# Altium PCB PCB1.1.PcbDoc (part 1 of 2)
Units mm, origin at the board's own origin, x right, y up, seen from the top; angles counter-clockwise.
Board outline 50 x 50 mm, 4 copper layers (Top Layer, Mid-Layer 1, Mid-Layer 2, Bottom Layer); 153 components, 106 nets, 555 pads, 173 vias.
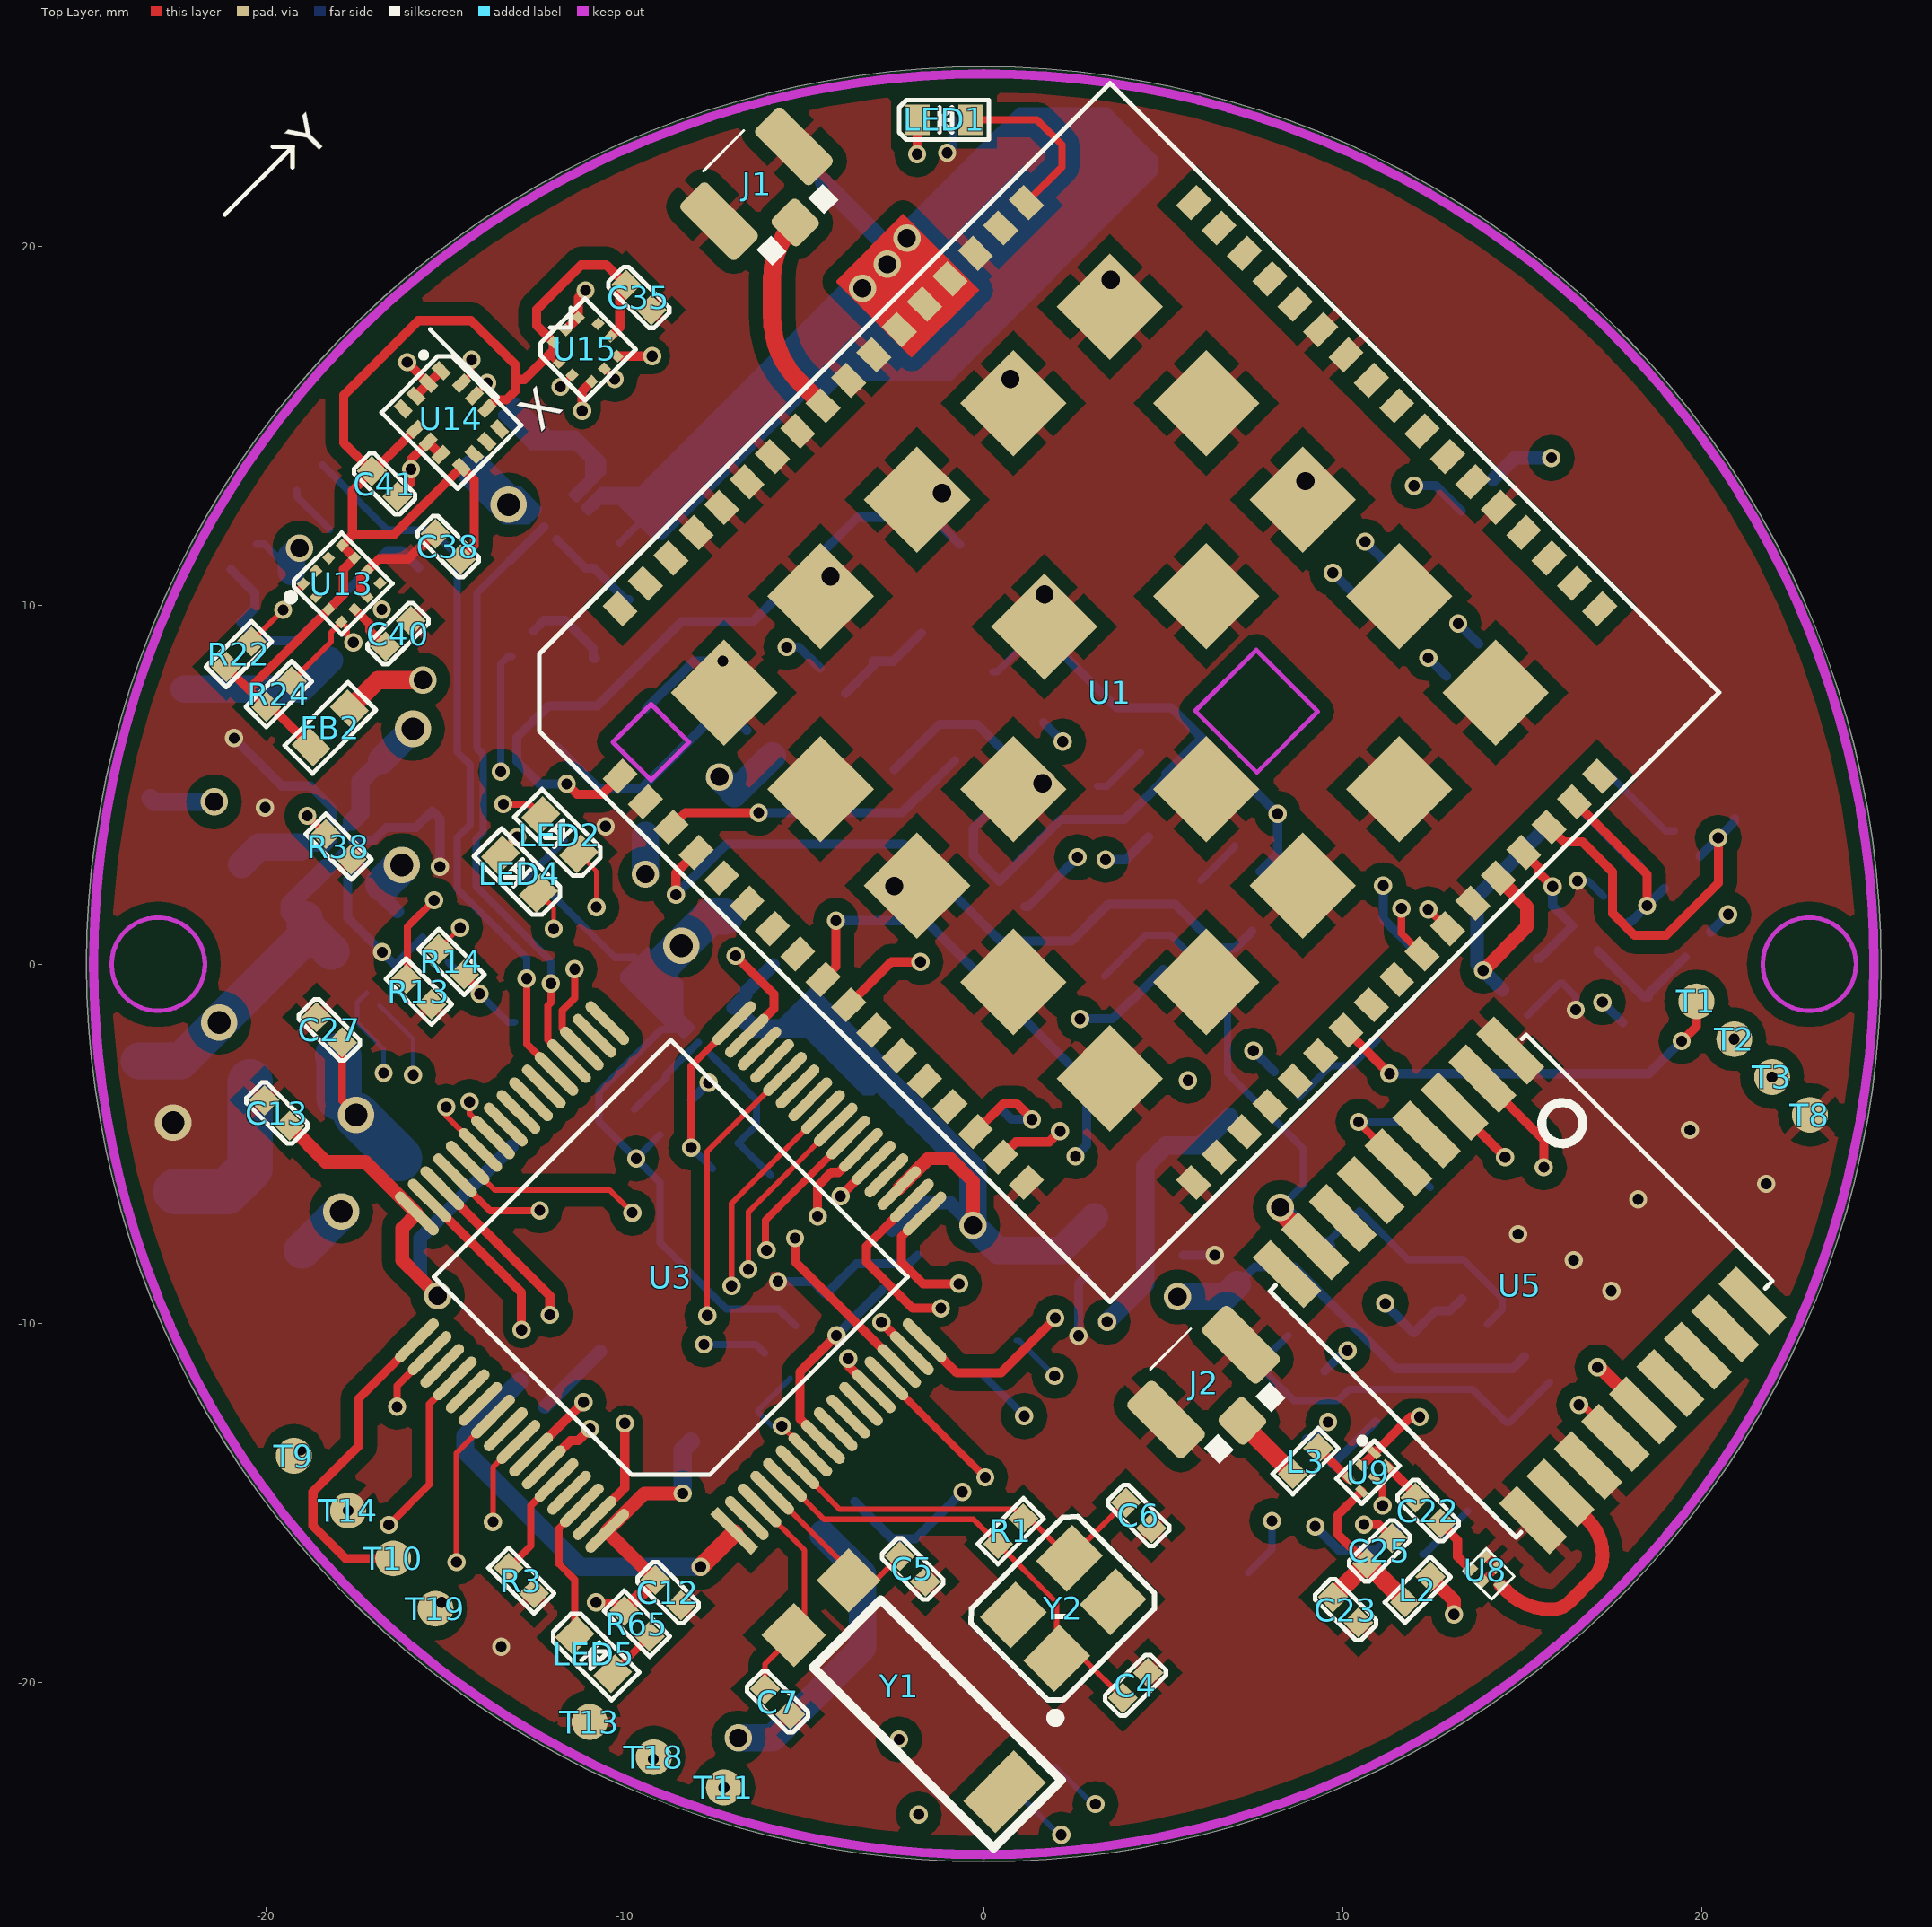
[diagram p0: Top Layer view]
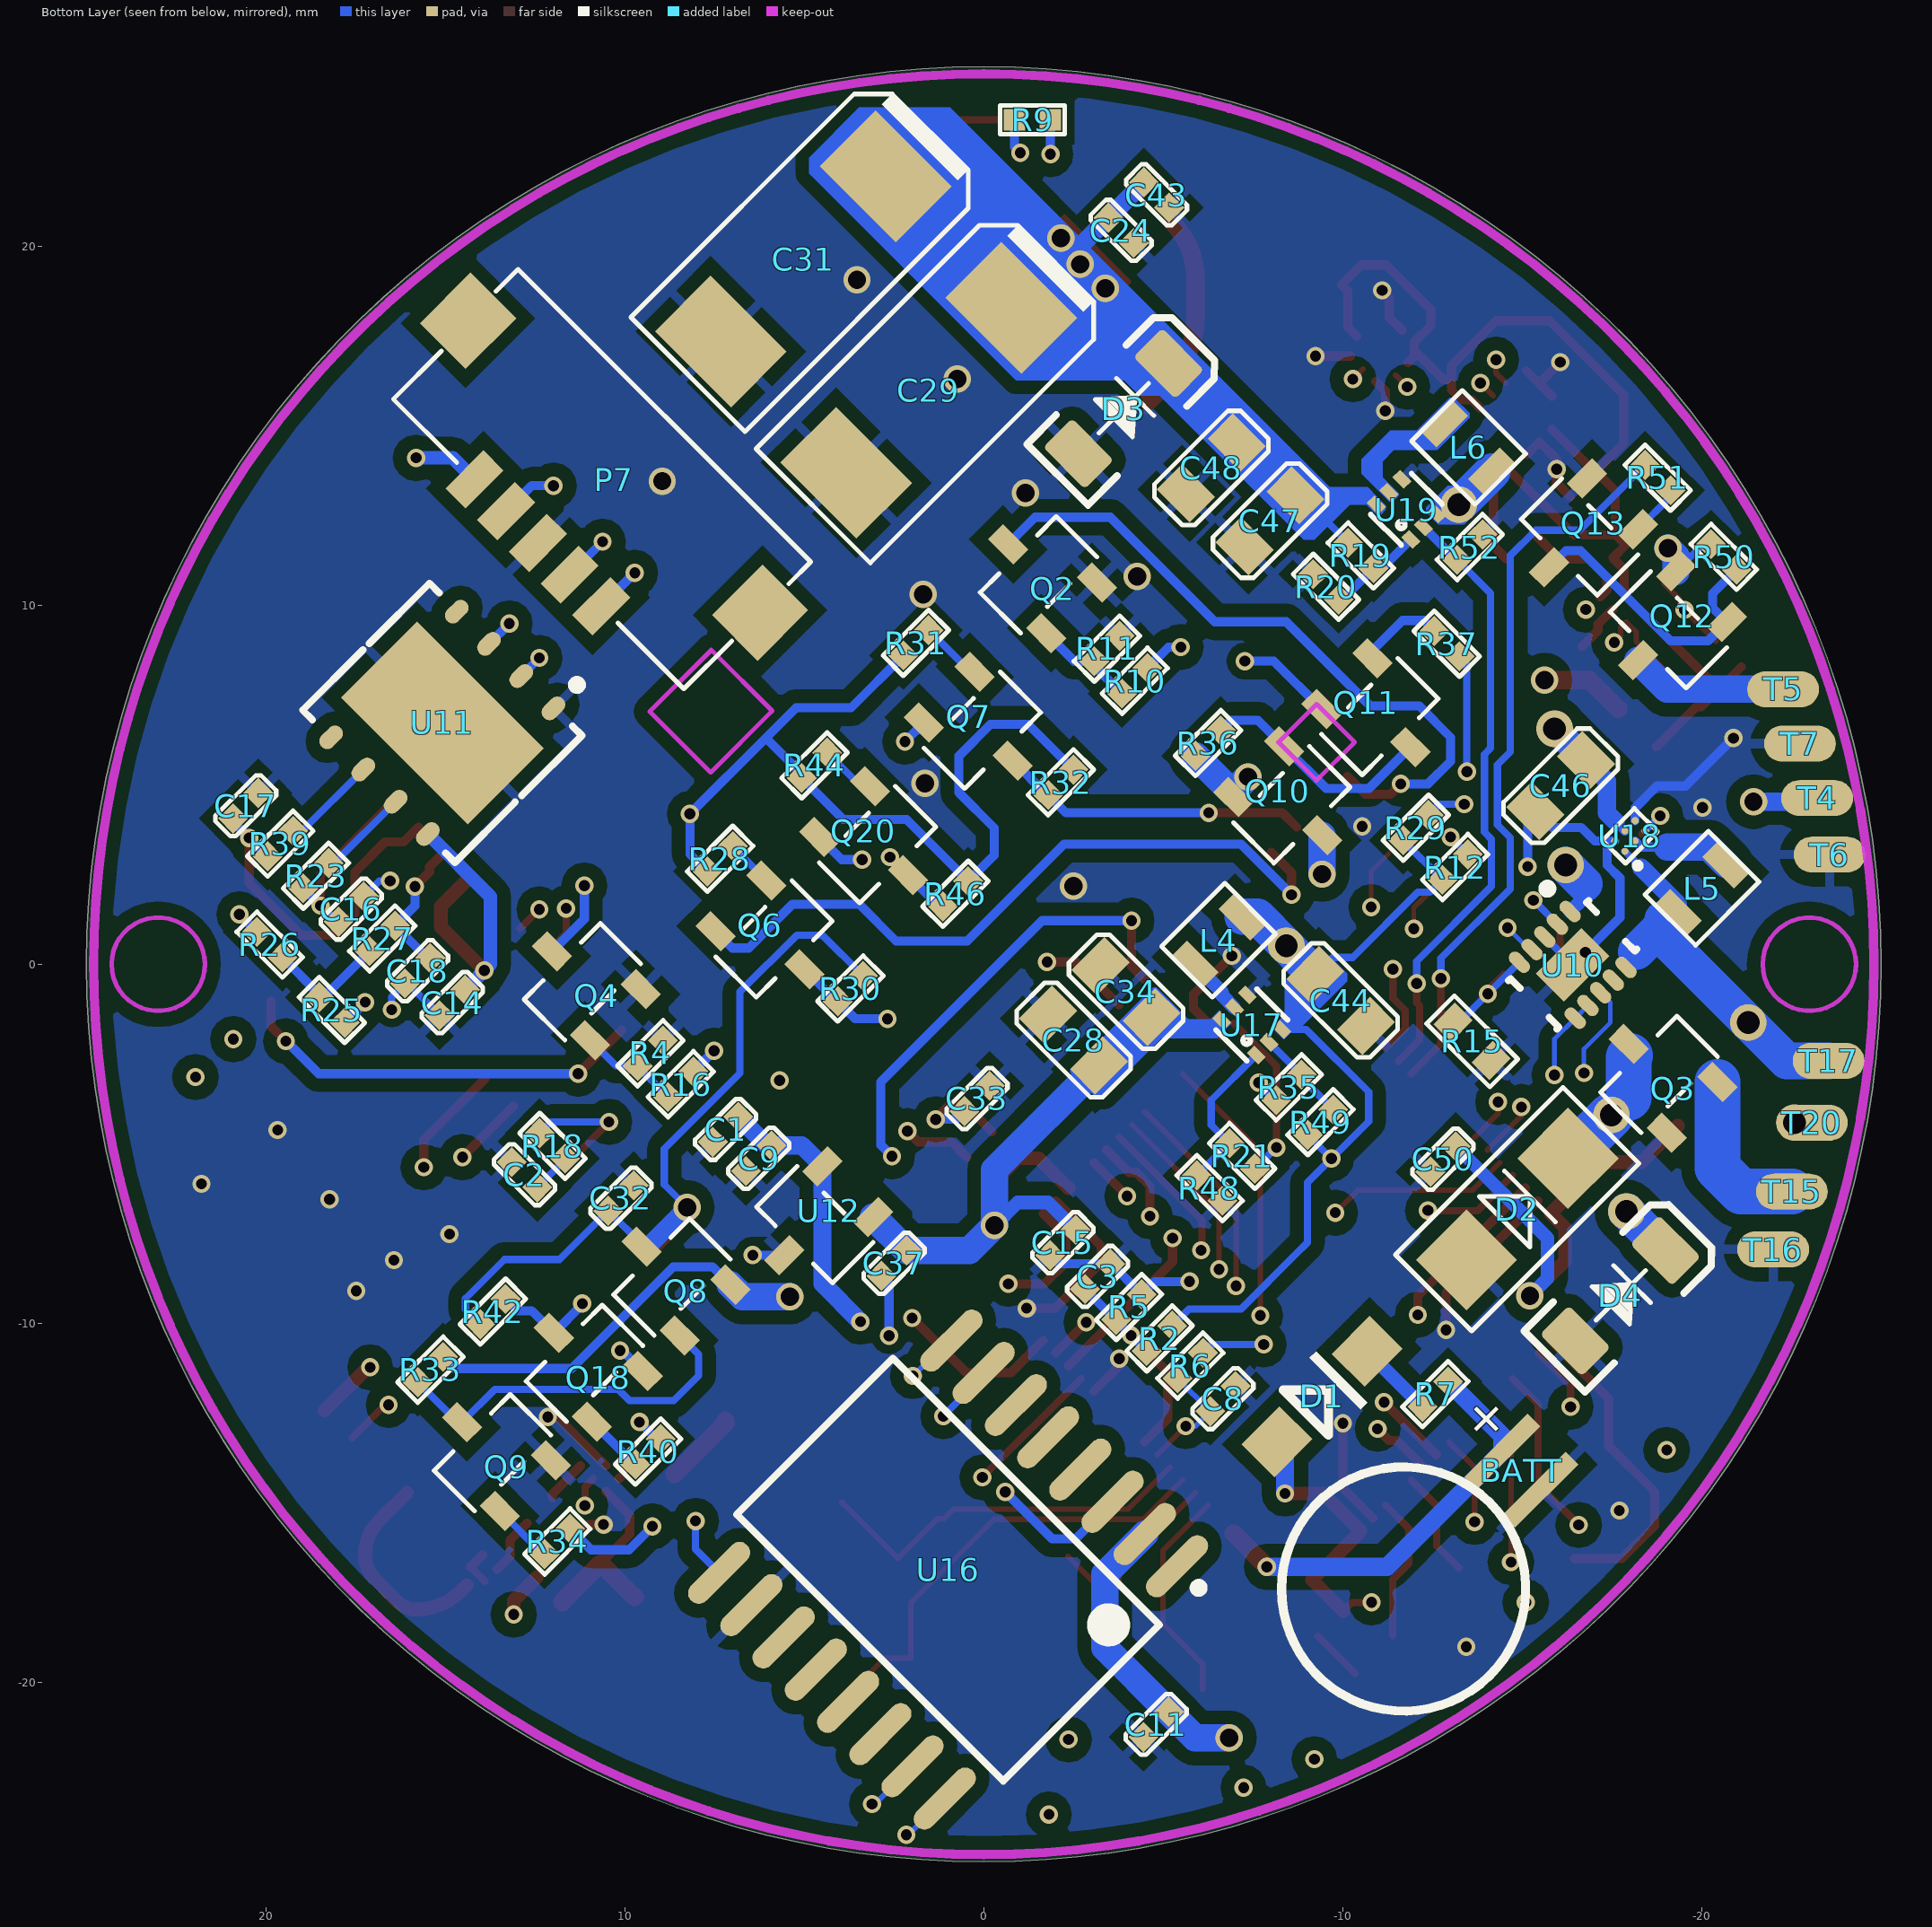
[diagram p1: Bottom Layer view, seen from below]
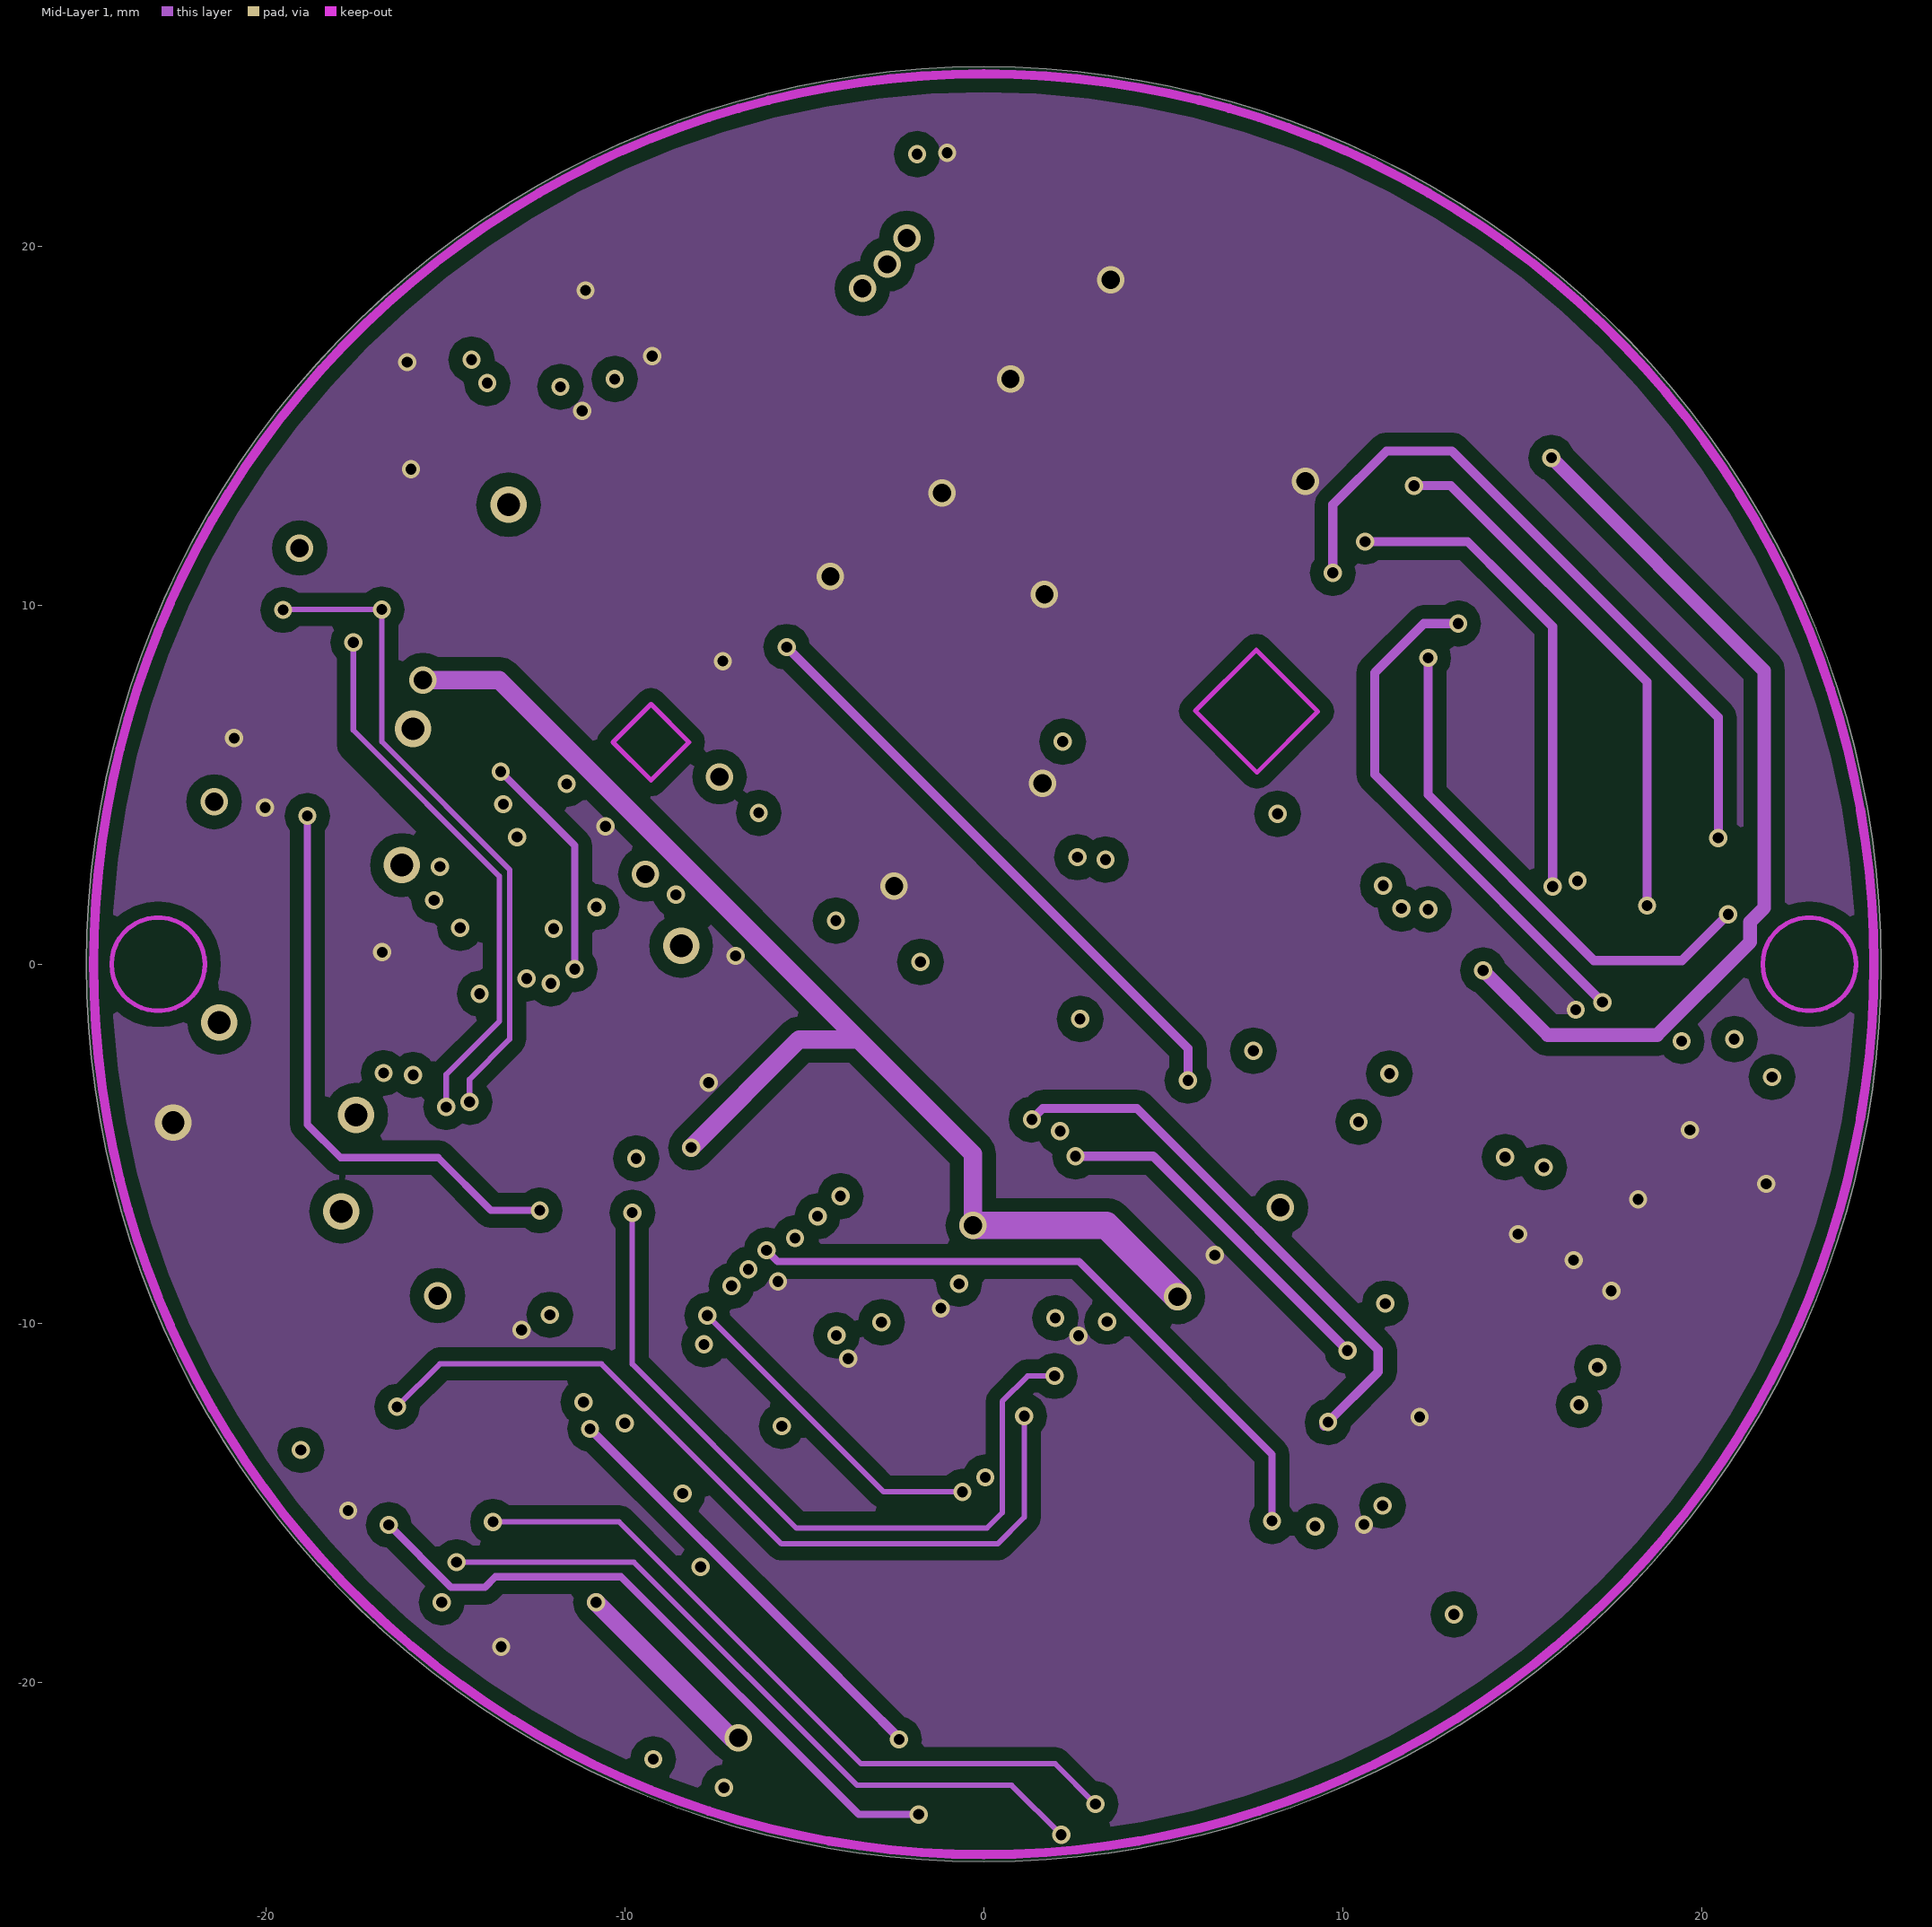
[diagram p2: Mid-Layer 1]
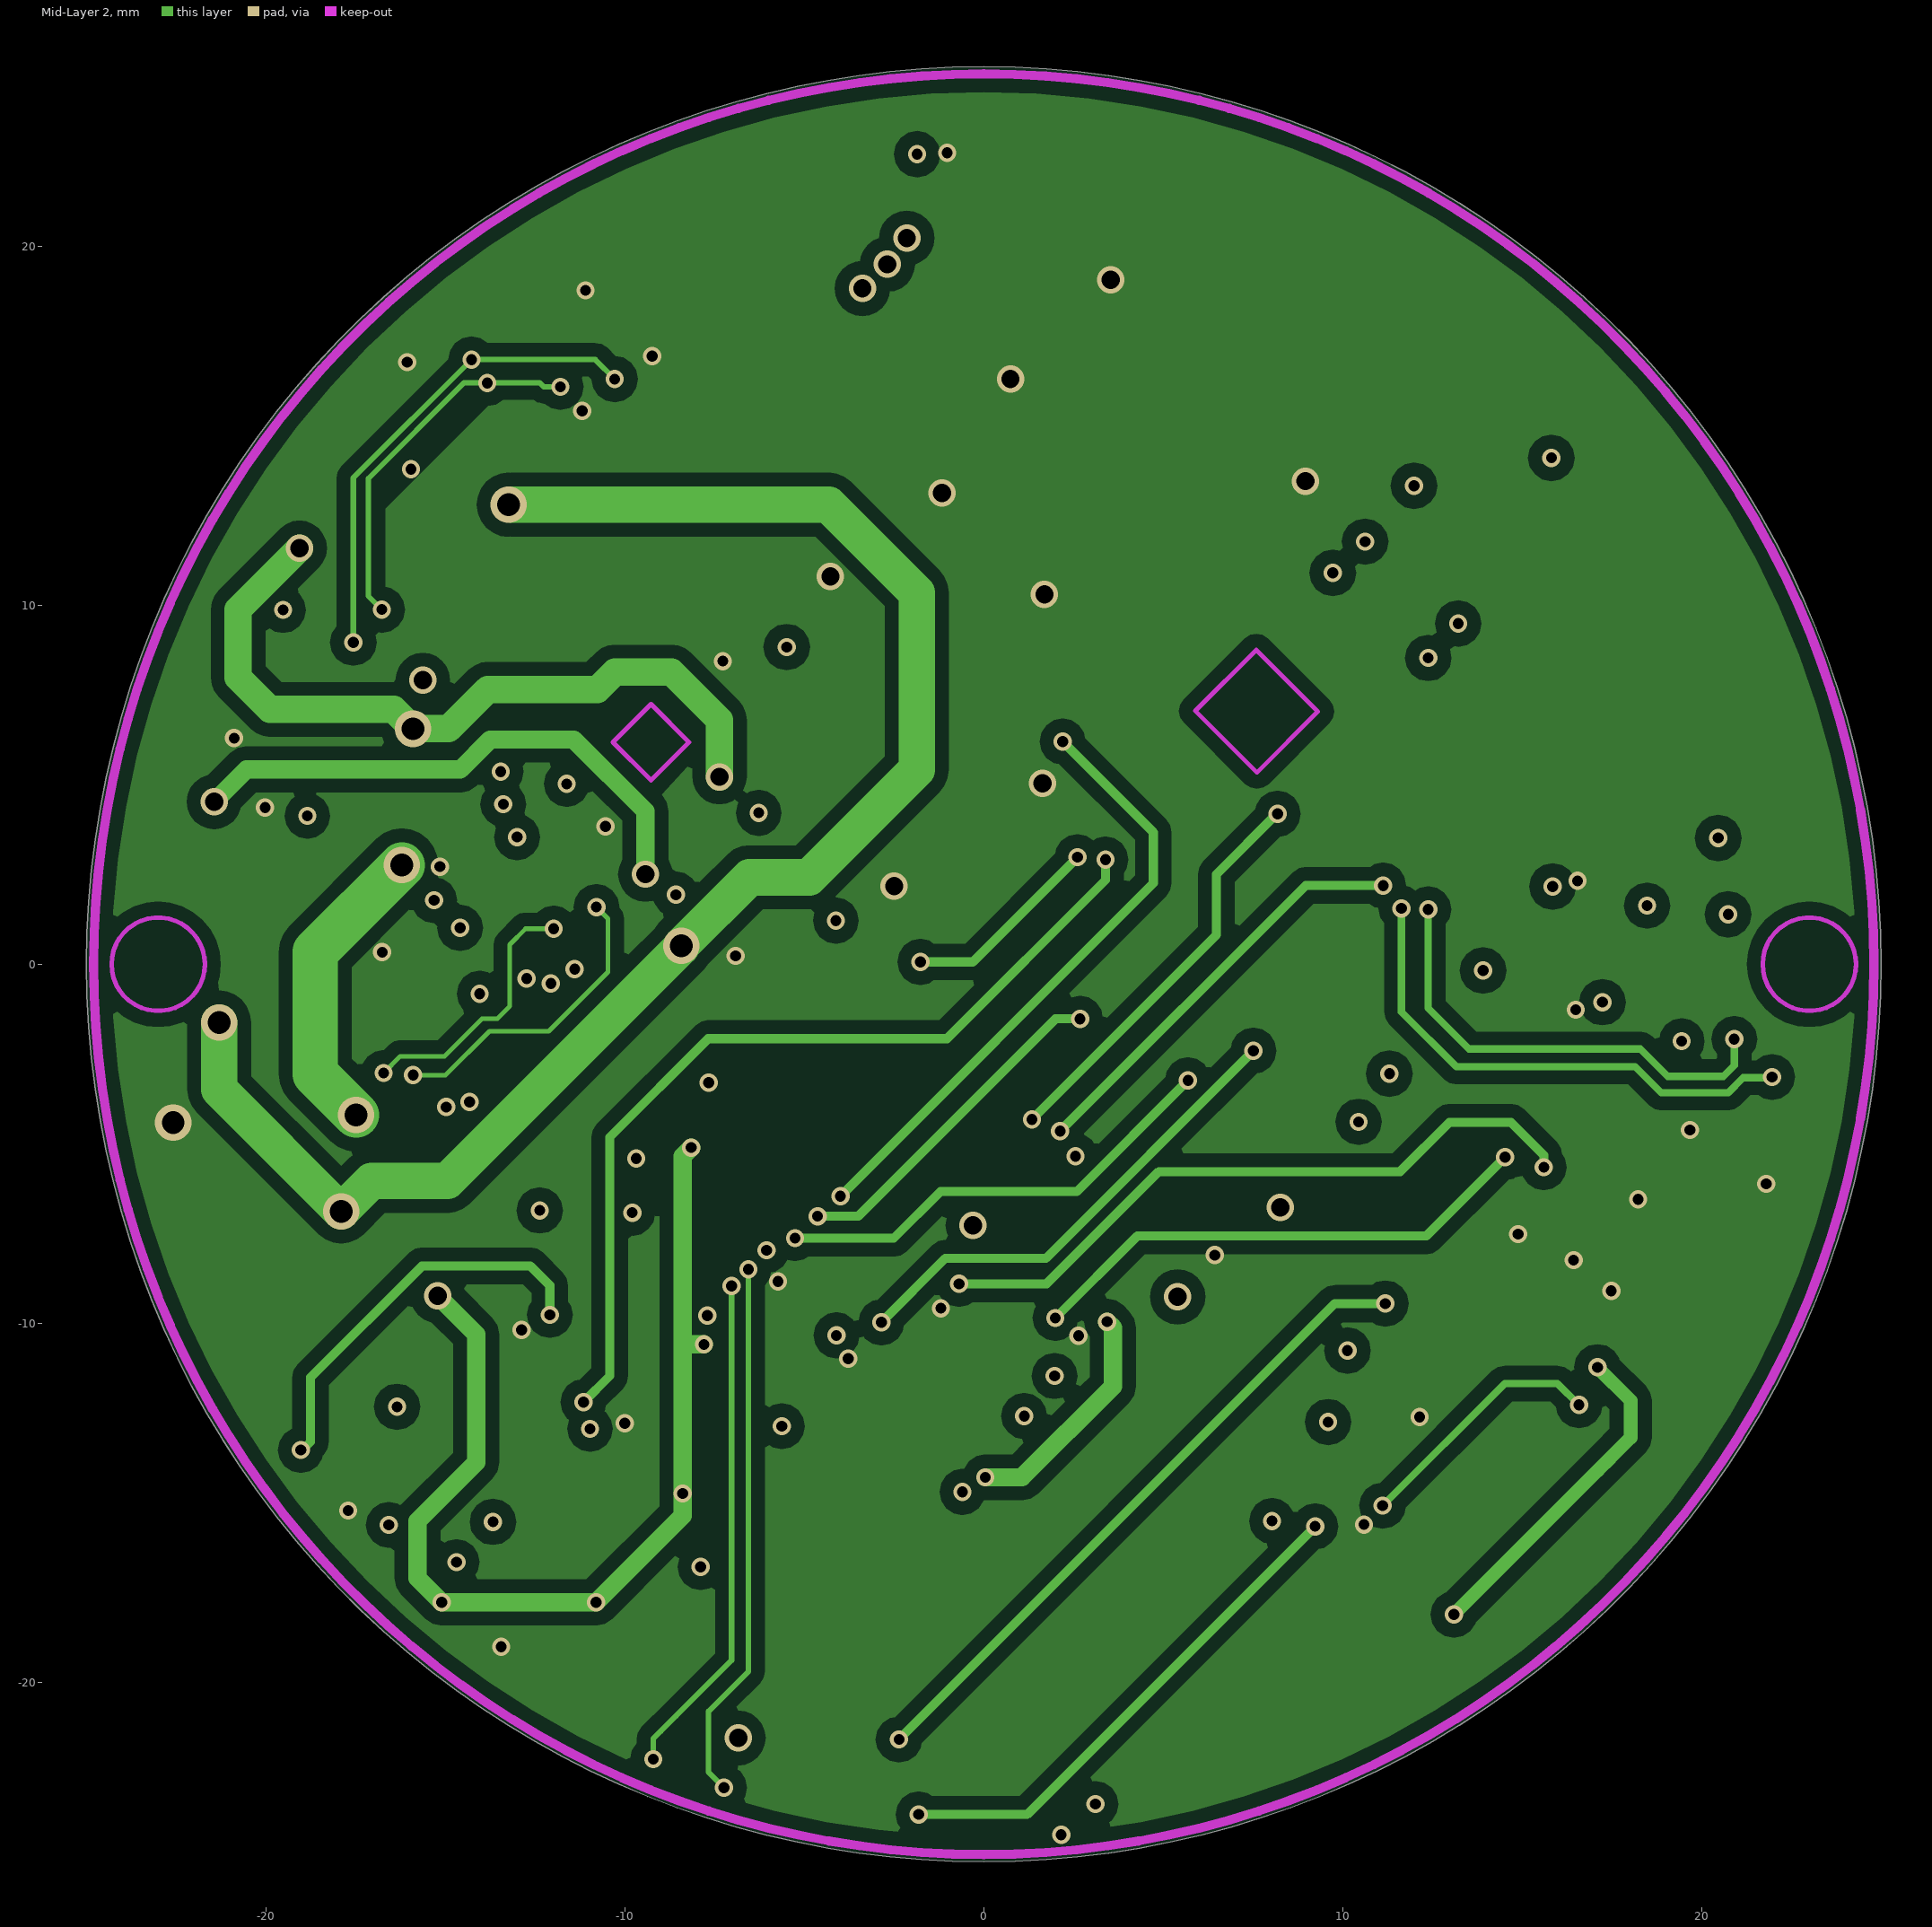
[diagram p3: Mid-Layer 2]

## Layer stack, top to bottom
Top Layer: signal copper 0.0356
Dielectric: core 0.32, FR-4, Dk 4.8
Mid-Layer 1: signal copper 0.0356
Dielectric: prepreg 0.32, FR-4, Dk 4.8
Mid-Layer 2: signal copper 0.0356
Dielectric: core 0.32, FR-4, Dk 4.8
Bottom Layer: signal copper 0.0356

## Board outline
-25,0 ccw(c0,0) 0,-25 ccw(c0,0) 25,0 ccw(c0,0) 0,25 ccw(c0,0)

## Design rules (kind name [scope] priority, off if disabled: settings)
Clearance [InPolygon  And InNet(AGND)] p1: gap=0.381
Clearance Clearance_1 [All] p2: gap=0.127
HoleToHoleClearance [All] p1: gap=0.127 allowstackedmicrovias=TRUE
MinimumSolderMaskSliver [All] p1: minsoldermaskwidth=0.025
PolygonConnect PolygonConnect_1 [InNet('AGND') And IsVia] p1: connectstyle=Direct reliefconductorwidth=0.254 reliefentries=4 polygonreliefangle="90 Angle"
PolygonConnect [All] p2: connectstyle=Relief reliefconductorwidth=0.254 reliefentries=4 polygonreliefangle="90 Angle"
RoutingVias [All] p1: holewidth=0.711 width=1.27 viastyle="Through Hole" minholewidth=0.711 minwidth=1.27 maxholewidth=0.711 maxwidth=1.27
SilkToSilkClearance [All] p1: silktosilkclearance=0.127
SilkscreenOverComponentPads [All] p1: minsilkscreentomaskgap=0.025
SolderMaskExpansion [All] p1: expansion=0.102
Width [All] p1: maxlimit=5.08 minlimit=0.127 preferedwidth=0.254
24 further rules are at their usual default settings.

## Classes and differential pairs
component class 4G: C2 C23 C32 L2 Q4 R4 R16 R18 U1 U5 U?
component class CPU: BATT C3 C4 C5 C6 C7 C8 C9 C11 C12 C13 C15 C50 D1 LED5 R1 R2 R3 R5 R6 R7 R65 T9 T10 T11 T13 T14 T18 T19 U3 U16 U? Y1 Y2
component class GPS&&lte: C14 C16 C17 C18 C22 C24 C25 C26 C29 C30 C31 C33 C43 D3 J1 J2 L3 LED1 P7 Q2 Q6 Q7 Q18 Q19 Q20 Q21 R8 R9 R10 R11 R23 R25 R26 R27 R28 R30 R31 R32 R39 R40 R41 R42 R43 R44 R45 R46 R47 T1 T2 T3 T8 U8 U9 U11
component class power: C1 C27 C28 C34 C37 C44 C46 C47 C48 D2 D4 L4 L5 L6 LED2 LED4 Q3 Q8 Q9 Q10 Q11 Q12 Q13 R12 R13 R14 R15 R19 R20 R21 R29 R33 R34 R35 R36 R37 R38 R48 R49 R50 R51 R52 T4 T5 T6 T7 T15 T16 T17 T20 U10 U12 U17 U18 U19
component class sensors: C35 C38 C40 C41 FB2 R22 R24 U13 U14 U15

## Components (designator, comment, footprint, x,y, rotation, side; value= is the part's Value field where it differs from the comment)
BATT "MS621FE" MS621FE -14.974,-14.107 r135 bottom
C1 "0.1uF/25V" 0402c 6.84,-4.247 r315 bottom
C2 "4.7uF/10V" 0402c 13.149,-5.509 r225 bottom
C3 "0.1uF/25v" 0402c -2.818,-9.051 r135 bottom
C4 "22pF" 0402c 4.578,-19.732 r225 top
C5 "6pF" 0402c -2.339,-16.488 r315 top
C6 "22pF" 0402c 4.667,-15.706 r135 top
C7 "6pF" 0402c -6.098,-20.19 r315 top
C8 "0.1uF/25V" 0402C -7.016,-11.746 r315 bottom
C9 "0.1uF/25V" 0402C 6.624,-5.759 r135 bottom
C11 "0.1uF/25V" 0402C -4.446,-21.527 r135 bottom
C12 "0.1uF/25V" 0402C -8.442,-17.855 r135 top
C13 "0.1uF/25V" 0402C -20.045,-3.791 r315 top
C14 "0.1uF" 0402C 15.158,-1.421 r135 bottom
C15 "0.1uF/25V" 0402C -1.849,-8.105 r135 bottom
C16 "10pF/NC" 0402C 17.271,1.891 r315 bottom
C17 "10pF/NC" 0402C 20.209,4.768 r315 bottom
C18 "10pF/NC" 0402C 16.128,-0.536 r135 bottom
C22 "36pF" 0402c 12.728,-15.571 r135 top
C23 "4.7uF" 0402c 10.435,-18.334 r135 top
C24 "10pF" 0402C -4.178,20.088 r45 bottom
C25 "0.1uF" 0402C 11.379,-15.983 r225 top
C27 "1uF/25V" 0402C -17.876,-2.181 r135 top
C28 "22uF/10V" 0805C -3.21,-2.817 r45 bottom
C29 "1000uF" 7343 -0.763,18.284 r315 bottom
C31 "1000uF" 7343 2.729,21.942 r315 bottom
C32 "10uF/10V" 0402C 9.757,-6.162 r315 bottom
C33 "0.1uF" 0402C -0.165,-3.386 r315 bottom
C34 "22uF/10V" 0805C -4.672,-1.473 r45 bottom
C35 "0.1uF/25V" 0402C -9.259,18.221 r135 top
C37 "0.1uF/25V" 0402c 2.147,-7.975 r315 bottom
C38 "0.1uF/25V" 0402C -15.279,11.987 r315 top
C40 "22pF" 0402c -16.669,8.852 r45 top
C41 "0.1uF/25V" 0402C -16.339,13.027 r135 top
C43 "33pF" 0402C -5.166,21.076 r45 bottom
C44 "22uF/10V" 0805C -9.235,-0.299 r225 bottom
C46 "22uF/10V" 0805C -16.781,5.681 r315 bottom
C47 "22uF/10V" 0805C -8.684,13.063 r315 bottom
C48 "22uF/10V" 0805C -7.048,14.531 r315 bottom
C50 "0.1uF/25V" 0402C -12.442,-5.781 r135 bottom
D1 "1N4148" DIODE_SOP -8.167,-13.299 r135 bottom
D2 "SMAJ12CA" SMA -13.448,-8.235 r135 bottom
D3 "DIODE_SCHOTTKY_0" LL-34(D1206) -3.893,15.477 r135 bottom
D4 "DIODE_SCHOTTKY_0" LL-34(D1206) -17.737,-9.232 r135 bottom
FB2 "10R/1A" 0603R -17.676,7.116 r225 top
J1 "IPEX" RF-UFL -6.331,21.739 r45 top
J2 "IPEX" RF-UFL 6.123,-11.64 r45 top
L2 "27nH" 0402R 12.443,-17.067 r225 top
L3 "LQW15A" 0402R 9.318,-13.489 r225 top
L4 "SRP4020TA-1R0M" L2520 -5.869,-0.015 r135 bottom
L5 "SRP4020TA-2R2M" L2520 -19.338,1.432 r135 bottom
L6 "SRP4020TA-1R0M" L2520 -12.822,15.068 r225 bottom
LED1 "LED" 0603LED -0.357,23.523 r180 top
LED2 "LED" 0603LED -12.342,4.137 r315 top
LED4 "LED" 0603LED -13.468,3.043 r315 top
LED5 "LED" 0603LED -10.335,-19.758 r135 top
P7 "Header 5" 5×1.25mmSMT 10.655,9.969 r45 bottom
Q2 "MMBT3904" SOT23-3 -1.737,9.223 r225 bottom
Q3 "Si2369DS" sot23-3 -19.025,-4.696 r225 bottom
Q4 "MMBT3904" SOT23-3 10.968,-2.112 r225 bottom
Q6 "MMBT3904" SOT23-3 6.057,2.331 r45 bottom
Q7 "MMBT3904" SOT23-3 0.253,8.144 r45 bottom
Q8 "Si2369DS" sot23-3 8.476,-10.338 r225 bottom
Q9 "S8050" SOT23-3 13.478,-15.233 r225 bottom
Q10 "Si2369DS" sot23-3 -8.367,6.067 r45 bottom
Q11 "S8050" SOT23-3 -10.825,8.525 r45 bottom
Q12 "Si2369DS" sot23-3 -20.701,9.53 r135 bottom
Q13 "S8050" SOT23-3 -18.223,12.114 r135 bottom
Q18 "MMBT3904" SOT23-3 10.916,-12.744 r225 bottom
Q20 "MMBT3904" SOT23-3 3.173,4.956 r45 bottom
R1 "1MR" 0402R 0.395,-16.145 r45 top
R2 "10K/1%" 0402R -5.249,-10.068 r315 bottom
R3 "100K" 0402R -13.239,-16.816 r315 top
R4 "47K" 0402R 9.645,-2.832 r135 bottom
R5 "10K/1%" 0402R -3.691,-9.902 r135 bottom
R6 "10K" 0402R -6.107,-10.826 r315 bottom
R7 "470" 0402R -12.226,-12.329 r135 bottom
R9 "1K" 0402R -1.857,23.523 r0 bottom
R10 "4.7K" 0402R -3.853,7.542 r135 bottom
R11 "47K" 0402R -3.077,8.438 r135 bottom
R12 "1K/1%" 0402R -12.778,2.353 r135 bottom
R13 "3.95K/1%" 0402R -16.095,-0.41 r315 top
R14 "21.5k/1%" 0402R -14.476,-0.286 r135 top
R15 "RTH103AT" 0603R -14.136,-2.678 r45 bottom
R16 "4.7K" 0402R 8.797,-3.697 r135 bottom
R18 "10K" 0402R 12.371,-4.705 r225 bottom
R19 "534K/1%" 0402R -10.15,11.739 r225 bottom
R20 "100K/1%" 0402R -9.179,10.867 r225 bottom
R21 "400K/1%" 0402R -7.554,-5.694 r45 bottom
R22 "4.7K" 0402R -21.106,8.284 r45 top
R23 "10R" 0402R 18.96,2.112 r135 bottom
R24 "4.7K" 0402R -19.285,7.877 r225 top
R25 "0R" 0402R 17.806,-1.627 r45 bottom
R26 "0R" 0402R 20.249,0.901 r225 bottom
R27 "10R" 0402R 16.403,1.072 r315 bottom
R28 "4.7K" 0402R 6.993,3.291 r315 bottom
R29 "1K/1%" 0402R -11.683,3.449 r135 bottom
R30 "10K" 0402R 4.07,-1.031 r135 bottom
R31 "4.7K" 0402R 1.536,9.307 r315 bottom
R32 "4.7K" 0402R -1.792,4.715 r135 bottom
R33 "4K7" 0402R 15.061,-10.937 r315 bottom
R34 "4K7" 0402R 12.234,-16.432 r135 bottom
R35 "10K/1%" 0402R -8.146,-3.783 r135 bottom
R36 "4K7" 0402R -5.895,5.807 r135 bottom
R37 "4K7" 0402R -12.547,9.281 r225 bottom
R38 "10K/1%" 0402R -17.621,2.921 r135 top
R39 "10R" 0402R 19.952,3.006 r135 bottom
R40 "4.7K" 0402R 9.707,-13.93 r135 bottom
R42 "10K" 0402R 13.322,-9.322 r315 bottom
R44 "4.7K" 0402R 4.364,5.894 r315 bottom
R46 "4.7K" 0402R 1.141,1.609 r135 bottom
R48 "100K/1%" 0402R -6.645,-6.588 r45 bottom
R49 "13K/1%" 0402R -9.027,-4.753 r135 bottom
R50 "4K7" 0402R -20.264,11.701 r225 bottom
R51 "4K7" 0402R -19.131,13.2 r45 bottom
R52 "10K/1%" 0402R -13.894,11.973 r315 bottom
R65 "1K" 0402R -9.31,-18.721 r135 top
T1 "TPD" TPD 19.854,-1.034 r45 top
T2 "TPD" TPD 20.908,-2.088 r45 top
T3 "TPD" TPD 21.962,-3.142 r45 top
T4 "TPD" TP#1 -23.217,4.629 r0 top
T5 "TPD" TP#1 -22.272,7.659 r0 top
T6 "TPD" TP#1 -23.562,3.054 r0 top
T7 "TPD" TP#1 -22.737,6.144 r0 top
T8 "TPD" TPD 23.015,-4.195 r45 top
T9 "TPD" TPd -19.221,-13.693 r45 top
T10 "TPD" TPd -16.453,-16.552 r225 top
T11 "TPD" TPd -7.242,-22.93 r90 top
T13 "TPD" TPd -10.981,-21.106 r90 top
T14 "TPD" TPd -17.707,-15.219 r225 top
T15 "TPD" TP#1 -22.511,-6.332 r180 top
T16 "TPD" TP#1 -21.991,-7.942 r180 top
T17 "TPD" TP#2 -23.538,-2.693 r180 bottom
T18 "TPD" TPd -9.195,-22.089 r90 top
T19 "TPD" TPd -15.275,-17.949 r90 top
T20 "TPD" TP#1 -23.072,-4.415 r180 top
U1 "A7670" A7670 3.515,7.568 r45 top
U3 "stm32l412r8t6" LQFP-64 -6.955,-15.781 r135 top
U5 "SIM868E/SIM68" SIM68MB 14.67,-2.406 r315 top
U8 "SAFFB1G56KB0F0A" SAFFB1G56KB0F0A 14.397,-17.291 r135 top
U9 "AW5005DNR" AW5005 10.705,-14.148 r315 top
U10 "bq24210" QFN50P200X300X80-10N -16.407,-0.017 r225 bottom
U11 "SLI76CF3600P" QFN127P500X600X80-8N 15.086,6.725 r315 bottom
U12 "REF3025AIDBZR" SOT23-3 3.081,-7.041 r135 bottom
U13 "LIS2MDL" LIS2MDL -17.889,10.601 r45 top
U14 "LSM6DS3TR" LSM6DS3TR-C -14.834,15.19 r315 top
U15 "BMP388" BMP388 -11.109,17.125 r135 top
U16 "MX25L51245GMI-10G" SOP127P1030X239-16N 0.994,-16.862 r315 bottom
U17 "TPS61023" SOT563-6 -7.467,-1.699 r135 bottom
U18 "TPS610997YFFR" TPS610997YFFR -18.003,3.573 r45 bottom
U19 "TPS61023" SOT563-6 -11.773,12.662 r135 bottom
Y1 "MC-146 32.768K/6pF" 32.768K -5.294,-18.689 r45 top
Y2 "8MHz" OSCILLATOR-3.2X2.5 2.207,-17.951 r45 top

## Footprints (in the part's own frame and the unit in brackets; to place one, negate y for a bottom-side part, rotate by r counter-clockwise, add the part's x,y. Pads: shape width x height; smd on the part's side, far side on the other; paste and mask are expansions set on the pad)
5×1.25mmSMT [mm]
  rect 1.8x2 smd: 0(-3.25,-3) 0(8.25,-3)
  rect 0.8x1.5 smd: 1(0,0) 2(1.25,0) 3(2.5,0) 4(3.75,0) 5(5,0)
  round 0.5 on Bottom Overlay: ""(-0.875,0.432)
  silkscreen extent -3.25,-5 8.28,0.02
32.768K [mm]
  rect 1.27x1.27 smd: 1(0,0) 2(2.159,0)
  rect 2x1.27 smd: 3(1.07,-7.239)
  silkscreen extent -0.25,-8.13 2.41,-1.02
0402c [mm]
  rect 0.6x0.6 smd: 1(0,0) 2(1,0)
  silkscreen extent -0.4,-0.4 1.4,0.4
0402C [mm]
  rect 0.6x0.6 smd: 1(0,0) 2(1,0)
  silkscreen extent -0.4,-0.4 1.4,0.4
0402R [mm]
  rect 0.6x0.6 smd: 1(0,0) 2(1,0)
  silkscreen extent -0.4,-0.4 1.4,0.4
0603LED [mm]
  rect 0.7x0.85 smd: 1(0,0) 2(1.5,0)
  silkscreen extent -0.5,-0.55 2,0.55
0603R [mm]
  rect 0.7x0.85 smd: 1(0,0) 2(1.5,0)
  silkscreen extent -0.5,-0.55 2,0.55
0805C [mm]
  rect 1x1.3 smd: 1(0,0) 2(2,0)
  silkscreen extent -0.7,-0.8 2.7,0.8
7343 [mm]
  rect 2.2x3 smd: 1(0,0) 2(6.5,0)
  silkscreen extent -1.75,-2.25 7.8,2.25
A7670 [mm]
  rect 0.8x0.6 smd: 1(-11.3,8) 2(-11.3,7) 3(-11.3,6) 4(-11.3,5) 5(-11.3,4) 6(-11.3,3) 7(-11.3,2) 8(-11.3,1) 9(-11.3,0) 10(-11.3,-1) 11(-11.3,-2) 12(-11.3,-3) 13(-11.3,-4) 14(-11.3,-5) 15(-11.3,-6) 16(-11.3,-7) 17(-11.3,-8) 35(11.3,-8) 36(11.3,-7) 37(11.3,-6) 38(11.3,-5) 39(11.3,-4) 40(11.3,-3) 41(11.3,-2) 42(11.3,-1) 43(11.3,0) 44(11.3,1) 45(11.3,2) 46(11.3,3) 47(11.3,4) 48(11.3,5) 49(11.303,6) 50(11.3,7) 51(11.3,8)
  rect 0.6x0.8 smd: 18(-8,-11.3) 19(-7,-11.3) 20(-6,-11.3) 21(-5,-11.3) 22(-4,-11.3) 23(-3,-11.3) 24(-2,-11.3) 25(-1,-11.3) 26(0,-11.3) 27(1,-11.3) 28(2,-11.3) 29(3,-11.3) 30(4,-11.3) 31(5,-11.3) 32(6,-11.3) 33(7,-11.3) 34(8,-11.3) 52(8,11.3) 53(7,11.3) 54(6,11.3) 55(5,11.3) 56(4,11.3) 57(3,11.3) 58(2,11.3) 59(1,11.3) 60(0,11.3) 61(-1,11.3) 62(-2,11.3) 63(-3,11.3) 64(-4,11.3) 65(-5,11.3) 66(-6,11.3) 67(-7,11.3) 68(-8,11.3)
  rect 2.1x2.1 smd: 69(-7.6,7.6) 70(-7.6,3.8) 71(-7.6,0) 72(-7.6,-3.8) 73(-7.6,-7.6) 74(-3.8,-7.6) 75(0,-7.6) 76(3.8,-7.6) 77(7.6,-7.6) 78(7.6,-3.8) 79(7.6,0) 80(7.6,3.8) 81(7.6,7.6) 82(3.8,7.6) 83(0,7.6) 84(-3.8,7.6) 85(-3.8,0) 86(0,-3.8) 87(3.8,0) 88(0,2.591)
  Keep-Out Layer lines w0.127: 1.321,-2.045 3.721,-2.045 ; 1.321,-2.07 1.321,-4.47 3.721,-4.47 3.721,-2.07 ; -10.77,8.814 -9.27,8.814 -9.27,7.314 -10.77,7.314 -10.77,8.814
  silkscreen extent -12,-12 12,12
AW5005 [mm]
  rect 0.35x0.2 smd: 1(-0.25,0.5) 2(-0.25,0) 3(-0.25,-0.5) 4(0.25,-0.5) 5(0.25,0) 6(0.25,0.5)
  silkscreen extent -0.77,-0.75 0.5,0.75
BMP388 [mm]
  rect 0.25x0.275 smd: 1(0.25,0.763) 2(-0.25,0.763) 6(-0.25,-0.763) 7(0.25,-0.763)
  rect 0.275x0.25 smd: 3(-0.762,0.5) 4(-0.762,0) 5(-0.762,-0.5) 8(0.763,-0.5) 9(0.763,0) 10(0.763,0.483)
  silkscreen extent -1,-1 1,1
DIODE_SOP [mm]
  rect 1.5x1.3 smd: 1(0,0) 2(3.556,0)
  silkscreen extent 1.14,-1.02 2.56,1.02
L2520 [mm]
  rect 0.65x1.25 smd: 1(0,0) 2(1.9,0)
  silkscreen extent -0.29,-0.99 2.21,1.01
LIS2MDL [mm]
  rect 0.275x0.25 smd: 1(-0.763,0.75) 2(-0.763,0.25) 3(-0.763,-0.25) 4(-0.763,-0.75) 7(0.763,-0.75) 8(0.763,-0.25) 9(0.763,0.25) 10(0.763,0.75)
  rect 0.25x0.275 smd: 5(-0.25,-0.763) 6(0.25,-0.763) 11(0.25,0.762) 12(-0.25,0.762)
  silkscreen extent -1.35,-1 1,1
LL-34(D1206) [mil]
  rrect25% 45x65 smd: 1(-70,0) 2(70,0)
  silkscreen extent -102,-47 108,47, body extent -96,-94 94,96, height 56
LQFP-64 [mm]
  rect 1.6x0.3 smd: 1(0,0)
  oval 1.6x0.3 smd: 2(0,-0.5) 3(0,-1) 4(0,-1.5) 5(0,-2) 6(0,-2.5) 7(0,-3) 8(0,-3.5) 9(0,-4) 10(0,-4.5) 11(0,-5) 12(0,-5.5) 13(0,-6) 14(0,-6.5) 15(0,-7) 16(0,-7.5) 33(12.5,-7.5) 34(12.5,-7) 35(12.5,-6.5) 36(12.5,-6) 37(12.5,-5.5) 38(12.5,-5) 39(12.5,-4.5) 40(12.5,-4) 41(12.5,-3.5) 42(12.5,-3) 43(12.5,-2.5) 44(12.5,-2) 45(12.5,-1.5) 46(12.5,-1) 47(12.5,-0.5) 48(12.5,0)
  oval 0.3x1.6 smd: 17(2.5,-10) 18(3,-10) 19(3.5,-10) 20(4,-10) 21(4.5,-10) 22(5,-10) 23(5.5,-10) 24(6,-10) 25(6.5,-10) 26(7,-10) 27(7.5,-10) 28(8,-10) 29(8.5,-10) 30(9,-10) 31(9.5,-10) 32(10,-10) 49(10,2.5) 50(9.5,2.5) 51(9,2.5) 52(8.5,2.5) 53(8,2.5) 54(7.5,2.5) 55(7,2.5) 56(6.5,2.5) 57(6,2.5) 58(5.5,2.5) 59(5,2.5) 60(4.5,2.5) 61(4,2.5) 62(3.5,2.5) 63(3,2.5) 64(2.5,2.5)
  silkscreen extent 1.59,-8.41 10.91,0.92
LSM6DS3TR-C [mm]
  rect 0.48x0.3 smd: 1(-1.15,0.75) 2(-1.15,0.25) 3(-1.15,-0.25) 4(-1.15,-0.75) 8(1.15,-0.75) 9(1.15,-0.25) 10(1.15,0.25) 11(1.15,0.75)
  rect 0.3x0.48 smd: 5(-0.5,-0.91) 6(0,-0.91) 7(0.5,-0.91) 12(0.5,0.91) 13(0,0.91) 14(-0.5,0.91)
  silkscreen extent -1.83,-1.25 1.5,1.25
MS621FE [mm]
  rect 2.5x0.5 smd: 1(0,-0.749) 2(0,0.749)
  silkscreen extent -8.05,-3.41 -1.25,3.39
OSCILLATOR-3.2X2.5 [mil] "OSCILLATOR-3.2X2.5"
  rect 56x48 smd: 1(-43.31,-33.46) 2(44,-33.46) 3(44,34) 4(-43.31,34)
  silkscreen extent -95,-83 83,71
QFN50P200X300X80-10N [mm] "QFN, 10-Leads, Body 2.9x1.9mm (max), Pitch 0.50mm, IPC Medium Density"
  oval 0.7x0.35 smd: 1(-1.1,1) 2(-1.1,0.5) 3(-1.1,0) 4(-1.1,-0.5) 5(-1.1,-1) 6(1.1,-1) 7(1.1,-0.5) 8(1.1,0) 9(1.1,0.5) 10(1.1,1)
  rect 1.1x1.8 smd: 11(0,0)
  silkscreen extent -2.12,-1.58 0.95,1.57, body extent -0.95,-1.45 0.95,1.45, height 0.8
QFN127P500X600X80-8N [mm] "QFN, 8-Leads, Body 6.0x5.0mm (max), Pitch 1.27mm, IPC Medium Density"
  oval 0.75x0.45 smd: 1(-2.475,1.905) 2(-2.475,0.635) 3(-2.475,-0.635) 4(-2.475,-1.905) 5(2.475,-1.905) 6(2.475,-0.635) 7(2.475,0.635) 8(2.475,1.905)
  rect 3x5 smd: 9(0,0)
  silkscreen extent -3.52,-3 2.5,3
RF-UFL [mm]
  rrect30% 1x1.05 smd: 1(0,-1.525)
  rrect30% 1.05x2.2 smd: 2(-1.475,0) 2(1.475,0)
  silkscreen extent -1.3,-1.93 1.3,1.3, body extent -2.68,-2.68 2.68,2.68, height 1.25
SAFFB1G56KB0F0A [mm]
  rect 0.3x0.3 smd: 1(0,0)
  rect 0.25x0.35 smd: 2(0.425,-0.287) 5(0.425,0.287)
  rect 0.3x0.35 smd: 3(0.9,-0.287) 4(0.9,0.288)
  silkscreen extent -0.1,-0.44 1,0.46
SIM68MB [mm]
  rect 2x0.7 smd: 1(0,0) 2(0,-1.1) 3(0,-2.2) 4(0,-3.3) 5(0,-4.4) 6(0,-5.5) 7(0,-6.6) 8(0,-7.7) 9(0,-8.8) 10(9.7,-8.8) 11(9.7,-7.719) 12(9.7,-6.638) 13(9.7,-5.557) 14(9.7,-4.476) 15(9.7,-3.395) 16(9.7,-2.314) 17(9.7,-1.233) 18(9.7,-0.152)
  silkscreen extent 0,-9.47 9.7,0.63
SMA [mm]
  rect 2x2 smd: 1(0,0) 2(4,0)
  silkscreen extent -1.3,-1.5 5.3,1.5
SOP127P1030X239-16N [mm] "SOP, 16-Leads, Body 10.5x7.6mm (max), Pitch 1.27mm, IPC Medium Density"
  oval 2.2x0.6 smd: 1(-4.575,4.445) 2(-4.575,3.175) 3(-4.575,1.905) 4(-4.575,0.635) 5(-4.575,-0.635) 6(-4.575,-1.905) 7(-4.575,-3.175) 8(-4.575,-4.445) 9(4.575,-4.445) 10(4.575,-3.175) 11(4.575,-1.905) 12(4.575,-0.635) 13(4.575,0.635) 14(4.575,1.905) 15(4.575,3.175) 16(4.575,4.445)
  silkscreen extent -4.7,-5.25 3.07,5.42, body extent -3.8,-5.25 3.8,5.25, height 2.39
SOT23-3 [mm]
  rect 1x0.6 smd: 1(0,0) 2(0,2) 3(-2.5,1)
  silkscreen extent -2.1,-0.5 -0.5,2.5
sot23-3 [mm]
  rect 1x0.6 smd: 1(0,0) 2(0,2) 3(-2.5,1)
  silkscreen extent -2.1,-0.5 -0.5,2.5
SOT563-6 [mil] "SOT563-6"
  rect 12x18 smd: 1(-19.69,-26.57) 2(0,-26.57) 3(20,-26.57) 4(20,27) 5(0,27) 6(-19.69,27)
  silkscreen extent -31,-24 32,24
TP#1 [mm]
  oval 2x1 smd far side: 1(0,0)
TP#2 [mm]
  oval 2x1 smd: 1(0,0)
TPD [mm]
  round 1 smd: 1(0,0)
TPd [mm]
  round 1 smd: 1(0,0)
TPS610997YFFR [mm]
  round 0.2 smd: A1(-0.2,0.4) A2(0.2,0.4) B1(-0.2,0) B2(0.2,0) C1(-0.2,-0.4) C2(0.2,-0.4)
  silkscreen extent -0.77,-0.63 0.46,0.63

## Part data
BATT: library part SBatery
C1 C2 C22 C23 C37: library part Cap, "Capacitor"
C3 C4 C5 C6 C7 C8 C9 C11 C12 C13 C14 C15 C16 C17 C18 C24 C25 C27 C28 C32 C33 C34 C35 C38 C40 C41 C43 C44 C46 C47 C48 C50: library part CAP, "Capacitor"
C29 C31: library part "Cap Pol3", "Polarized Capacitor (Surface Mount)"
D1: library part D
D2: library part DIODE_SCHOTTKY_0
FB2: library part INDUCTOR1
J1 J2: library part ANT
L2 L3 L4 L5 L6: library part INDUCTOR_1
P7: "Header, 5-Pin"
Q2 Q4 Q9 Q11 Q13: library part 2N1069_1
Q3 Q8 Q10 Q12: library part NCE4060K, "NMOSFET"
Q6 Q7 Q18 Q20: library part NPN
R1: library part Res3, "Resistor"
R2 R4 R5 R9 R10 R11 R12 R13 R14 R15 R16 R18 R19 R20 R21 R22 R23 R24 R25 R26 R27 R28 R29 R30 R31 R32 R33 R34 R35 R36 R37 R38 R39 R40 R42 R44 R46 R48 R49 R50 R51 R52 R65: library part RES1
R3 R6 R7: library part Res2, "Resistor"
U3: library part STM32L100R8T6, "ARM Cortex-M3 32-bit MCU, 64 KB Flash, 8 KB Internal RAM, 51 I/Os, 64-pin LQFP, -40 to 85 degC, Tray"
U5: library part SIM68MB
U8: library part SAFFB1G56KBOFA
U10: library part bq2410
U12: library part REF3012
Y1 Y2: library part XTAL, "Crystal Oscillator"

## Via types
v1: diameter 0.508, hole 0.305, Top Layer to Bottom Layer, tented both sides, 144 vias
v2: diameter 0.762, hole 0.508, Top Layer to Bottom Layer, tented both sides, 21 vias
v3: diameter 1.016, hole 0.635, Top Layer to Bottom Layer, tented both sides, 8 vias

## Nets (pads, with @x,y where several pads share a name; then routed paths per layer and width w, separated by ;. In a path a pad name is that pad's centre, name@x,y a point inside that pad or via, vN(x,y) a via of type N, cw(c..) or ccw(c..) an arc to the next point about the centre after c; other vN are vias at no path point)
2.5V: C1.1 C9.2 U3.13 U12.2 | length 18.1
  Top Layer w0.203: U3.13@-2.712,-11.538 v1(0.041,-14.292)
  Mid-Layer 2 w0.508: v1(0.041,-14.292) 1.065,-14.292 3.596,-11.761 3.596,-10.117 v1(3.436,-9.957)
  Bottom Layer w0.508: v1(3.436,-9.957) 4.495,-8.898 U12.2@4.495,-5.627 5.07,-5.052 C9.2@5.917,-5.052 6.035,-5.052 C1.1@6.84,-4.247
AGND: BATT.1 C1.2 C2.1 C3.2 C4.1 C5.2 C6.1 C7.2 C8.1 C9.1 C11.1 C12.1 C13.1 C14.1 C15.1 C16.1 C17.1 C18.1 C23.1 C24.1 C25.1 C27.2 C28.2 C29.2 C31.2 C32.1 C33.1 C34.2 C35.1 C37.2 C38.1 C40.2 C41.1 C43.1 C44.2 C46.2 C47.2 C48.2 C50.1 D2.1 D3.1 D4.1 J1.2 J2.2 P7.3 Q2.2 Q3.1 Q4.2 Q9.2 Q11.2 Q13.2 R3.2 R4.2 R5.2 R9.2 R11.2 R13.2 R15.1 R20.1 R35.1 R38.1 R48.1 R52.1 T6.1 T7.1 T8.1 T13.1 T14.1 T16.1 T20.1 U1.2 U1.17 U1.18 U1.29 U1.39 U1.45 U1.46 U1.54 U1.58 U1.59 U1.61 U1.62 U1.63 U1.64 U1.65 U1.69 U1.70 U1.71 U1.72 U1.73 U1.74 U1.75 U1.76 U1.77 U1.78 U1.79 U1.80 U1.81 U1.82 U1.83 U1.84 U1.85 U1.86 U1.87 U1.88 U3.12 U3.18 U3.31 U3.47 U3.63 U5.1 U5.10 U5.12 U8.2 U8.3 U8.5 U9.1 U9.2 U10.3 U10.11 U11.1 U11.9 U12.3 U13.6 U13.8 U14.1 U14.2 U14.3 U14.6 U14.7 U15.3 U15.5 U15.8 U15.9 U16.10 U17.4 U18.A2 U18.C2 U19.4 | length 59.5
  Top Layer w0.203: U8.5@13.893,-17.194 U8.2@14.3,-16.787
  Top Layer w0.254: U13.6@-17.173,10.239 -17.359,10.425 -17.359,10.777 U13.8@-17.173,10.963 -16.845,11.291 -16.031,11.291 -15.335,11.987 C38.1@-15.279,11.987 ; C41.1@-16.339,13.027 -15.959,13.407 -15.959,14.066 U14.6@-15.478,14.547 U14.7@-15.124,14.193 ; v1(-16.062,16.771) U14.2@-15.471,16.18 ; U14.3@-15.824,15.827 U14.1@-15.117,16.534 ; U3.47@-15.44,-6.589 -12.879,-9.15 v1(-12.879,-10.185) ; U15.9@-11.648,17.664 U15.8@-11.295,18.018 -11.295,18.574 v1(-11.097,18.772) ; v1(-11.188,15.413) -11.188,15.968 U15.3@-10.924,16.232 ; U3.63@-10.844,-15.427 -10.003,-14.586 v1(-10.003,-12.787) ; U15.5@-10.216,16.94 v1(-9.24,16.94) ; v1(-6.913,0.231) -5.846,-0.836 -5.846,-1.237 U3.31@-6.601,-1.992 ; v1(-3.775,-10.986) -3.775,-11.183 U3.12@-3.066,-11.892 ; U3.18@-2.005,-6.589 -3.27,-7.853 -3.27,-8.296 -1.984,-9.582 v1(-1.195,-9.582) ; U9.2@10.528,-13.971 U9.1@10.882,-13.618 11.888,-12.611 v1(12.144,-12.611) ; v1(10.592,-15.608) 11.004,-15.608 C25.1@11.379,-15.983 ; U8.3@13.964,-16.451 U8.2@14.3,-16.787
  Bottom Layer w0.203: U10.11@-16.407,-0.017 U10.3@-15.629,0.761 ; C14.1@15.158,-1.421 16.043,-0.536 C18.1@16.128,-0.536 16.493,-0.901 v1(16.493,-1.267) ; v1(16.54,2.324) 16.838,2.324 C16.1@17.271,1.891
  Bottom Layer w0.254: v1(-20.886,6.299) -19.55,4.963 -18.756,4.963 -18.144,4.351 U18.C2@-18.144,3.997 ; U10.11@-16.407,-0.017 -17.724,1.3 -17.724,2.401 -17.368,2.757 -17.368,3.221 U18.A2@-17.579,3.432 -17.021,3.432 -16.645,3.808 -15.826,3.808 C46.2@-15.367,4.267 -15.152,4.052 v1(-15.152,2.718) ; Q11.2@-9.411,7.111 -8.079,8.443 v1(-7.272,8.443) ; R35.1@-8.146,-3.783 v1(-7.662,-3.299) ; v1(-5.733,-8.838) -4.755,-8.838 R5.2@-4.398,-9.195 -3.547,-8.344 C3.2@-3.525,-8.344 -2.088,-8.344 C15.1@-1.849,-8.105 ; v1(-1.019,22.603) -0.857,22.765 R9.2@-0.857,23.523 ; v1(2.639,-10.347) 2.639,-8.897 C37.2@2.854,-8.682 ; U12.3@5.556,-8.102 v1(6.437,-8.102)
  other v1: -13.444,-19.011 -17.707,-15.219 17.483,-9.1 16.433,-8.242 14.886,-7.519 18.229,-6.548 21.797,-6.119 19.674,-4.617 -16.761,0.337 -10.54,3.838 -20.024,4.365 -15.959,13.788
  other v2: -2.496,2.176 1.636,5.04 1.69,10.304 -4.271,10.798 -1.161,13.126 8.958,13.457 0.743,16.299 3.533,19.063
  other v3: -22.583,-4.407
CS: U3.50 U16.7 | length 26.7
  Top Layer w0.203: v1(-16.347,-12.327) -16.347,-11.738 U3.50@-15.44,-10.831
  Mid-Layer 1 w0.152: v1(-16.347,-12.327) -15.151,-11.131 -11.298,-11.131 -10.647,-11.131 -5.635,-16.143 0.388,-16.143 1.126,-15.405 v1(1.126,-12.584)
  Bottom Layer w0.203: U16.7@0.004,-11.382 0.004,-11.462 v1(1.126,-12.584)
DM: T2.1 U1.28 | length 13.6
  Top Layer w0.203: v1(12.382,1.529) U1.28@12.92,0.992
  Mid-Layer 2 w0.203: v1(12.382,1.529) 12.382,-1.223 13.521,-2.362 18.291,-2.362 19.053,-3.124 20.606,-3.124 20.911,-2.819 v1@20.911,-2.153
  other v1: 20.908,-2.088
DP: T3.1 U1.27 | length 15.8
  Top Layer w0.203: v1(11.636,1.555) 11.636,0.861 U1.27@12.212,0.285
  Mid-Layer 2 w0.203: v1(11.636,1.555) 11.636,-1.327 13.167,-2.858 18.149,-2.858 18.872,-3.581 20.74,-3.581 21.159,-3.162 v1@21.939,-3.162
  other v1: 21.962,-3.142
DTR: Q7.3 R32.1 U1.3 | length 10.3
  Top Layer w0.254: U1.3@-8.718,3.82 -8.321,4.217 -8.092,4.217 ; v1@-6.511,4.217 -8.092,4.217 ; v1(-6.269,4.217) -8.092,4.217
  Bottom Layer w0.254: v1(-6.269,4.217) -2.29,4.217 R32.1@-1.792,4.715 -1.762,4.715 Q7.3@-0.808,5.669
EN_3V8: R52.2 U3.36 U19.2 | length 17.1
  Top Layer w0.203: v1@-12.145,-0.622 v1(-12.061,-0.538) -12.061,-1.074 -12.145,-1.158 -12.145,-2.106 U3.36@-11.551,-2.7
  Bottom Layer w0.203: R52.2@-13.187,11.266 -14.12,10.333 -14.12,6.016 -13.949,5.845 -13.949,3.682 -14.146,3.485 -14.146,2.168 -12.061,0.083 v1(-12.061,-0.538)
  Bottom Layer w0.254: R52.2@-13.187,11.266 -13.169,11.266 U19.2@-12.25,12.185
EN_5V: R38.2 U3.45 U18.C1 | length 20.1
  Top Layer w0.203: v1(-18.845,4.132) -18.341,3.628 R38.2@-18.328,3.628 ; U3.45@-14.733,-5.882 -13.751,-6.864 v1@-12.378,-6.864
  Mid-Layer 1 w0.203: v1(-18.845,4.132) -18.845,-4.463 -17.923,-5.385 -15.201,-5.385 -13.729,-6.857 v1(-12.371,-6.857)
  Bottom Layer w0.203: v1(-18.845,4.132) U18.C1@-18.427,3.714
EN_5V1: R37.2 U3.35 | length 12.3
  Top Layer w0.203: v1(-11.399,-0.134) -11.399,-0.939 -11.745,-1.285 -11.745,-1.799 U3.35@-11.198,-2.346
  Mid-Layer 1 w0.203: v1(-13.459,5.364) -11.399,3.304 v1(-11.399,-0.134)
  Bottom Layer w0.203: v1(-13.459,5.364) -13.459,8.369 R37.2@-13.254,8.574 R37.2@-13.145,8.574
EN_5V2: R51.2 U3.37 | length 20.7
  Top Layer w0.203: v1(-12.736,-0.4) -12.736,-2.222 U3.37@-11.905,-3.053
  Bottom Layer w0.203: R51.2@-18.424,13.907 -16.605,12.088 -15.379,12.088 -14.671,11.38 -14.671,5.915 -14.311,5.555 -14.311,3.883 -14.668,3.526 -14.668,2.098 -12.736,0.166 v1(-12.736,-0.4)
LNA_EN: U5.13 U9.5 | length 9.4
  Top Layer w0.203: U9.5@10.882,-14.325 11.112,-14.555 v1(11.112,-15.078) ; v1(16.582,-12.274) 16.679,-12.274 U5.13@17.599,-13.194
  Mid-Layer 2 w0.203: v1(11.112,-15.078) 14.514,-11.676 15.984,-11.676 v1(16.582,-12.274)
MDTR: Q7.2 U3.21 | length 19.4
  Top Layer w0.254: v1(-3.992,-6.459) -3.992,-6.454 U3.21@-3.066,-5.528
  Mid-Layer 2 w0.254: v1(-3.992,-6.459) 4.724,2.257 4.724,3.673 v1(2.197,6.2)
  Bottom Layer w0.254: Q7.2@1.667,6.73 v1(2.197,6.2)
MISO: U3.44 U16.8 | length 28.1
  Top Layer w0.152: U3.44@-14.38,-5.528 -13.615,-6.293 -10.419,-6.293 v1(-9.792,-6.92)
  Mid-Layer 1 w0.152: v1(-9.792,-6.92) -9.792,-11.136 -5.224,-15.704 0.088,-15.704 0.513,-15.279 0.513,-12.175 1.219,-11.469 v1(1.974,-11.469)
  Bottom Layer w0.152: U16.8@0.902,-10.484 0.989,-10.484 v1(1.974,-11.469)
MOSI: U3.57 U16.15 | length 24.1
  Top Layer w0.152: v1(-13.673,-15.532) -13.673,-14.014 U3.57@-12.965,-13.306
  Mid-Layer 1 w0.152: v1(-13.673,-15.532) -10.158,-15.532 -3.423,-22.267 -2.295,-22.267 1.985,-22.267 v1(3.112,-23.394)
  Bottom Layer w0.152: U16.15@1.984,-22.342 3.036,-23.394 v1(3.112,-23.394)
MRI: Q6.3 R30.1 U3.22 | length 14.9
  Top Layer w0.254: v1(-4.63,-7.02) -4.63,-6.181 -4.248,-5.799 -4.044,-5.799 U3.22@-3.419,-5.174
  Mid-Layer 2 w0.254: v1(-4.63,-7.02) -3.5,-7.02 1.999,-1.521 v1(2.683,-1.521)
  Bottom Layer w0.254: v1(2.683,-1.521) 3.58,-1.521 R30.1@4.07,-1.031 4.109,-1.031 Q6.3@4.996,-0.144
NBIOT_GRXD: U3.17 U5.2 | length 25.5
  Top Layer w0.254: U3.17@-1.652,-6.942 -2.296,-7.586 -2.296,-8.3 -1.694,-8.902 v1(-0.688,-8.902) ; U5.2@13.892,-3.184 15.602,-4.894 v1(15.602,-5.655)
  Mid-Layer 2 w0.254: v1(-0.688,-8.902) 1.751,-8.902 4.876,-5.777 11.601,-5.777 12.972,-4.406 14.689,-4.406 15.602,-5.319 v1(15.602,-5.655)
NBIOT_GTXD: U3.16 U5.3 | length 21
  Top Layer w0.254: U3.16@-1.652,-10.478 -0.748,-11.382 0.474,-11.382 v1@1.979,-9.877 ; U5.3@13.114,-3.962 v1(14.524,-5.371)
  Mid-Layer 2 w0.254: v1(1.994,-9.854) 4.277,-7.571 12.324,-7.571 v1(14.524,-5.371)
NBIOT_NRXD: Q18.3 R42.1 U3.59 | length 35.4
  Top Layer w0.254: U3.59@-12.258,-14.013 -11.515,-13.27 -11.299,-13.27 v1(-10.97,-12.941)
  Mid-Layer 1 w0.254: v1(-10.97,-12.941) -4.684,-19.227 -3.357,-20.554 -2.361,-21.55 v1(-2.361,-21.594)
  Mid-Layer 2 w0.254: v1(-2.361,-21.594) 9.781,-9.452 v1(11.186,-9.452)
  Bottom Layer w0.254: v1@11.197,-9.489 Q18.3@11.977,-10.269 12.591,-9.655 12.989,-9.655 R42.1@13.322,-9.322
NBIOT_NTXD: Q20.2 U3.58 | length 28.6
  Top Layer w0.254: U3.58@-12.612,-13.66 v1(-11.152,-12.197) v1(-11.152,-12.197)
  Mid-Layer 2 w0.254: v1(-11.152,-12.197) -10.419,-11.465 -10.419,-4.816 -7.675,-2.072 -1.027,-2.072 3.39,2.345 v1(3.39,2.913)
  Bottom Layer w0.254: v1(3.39,2.913) 3.958,2.913 Q20.2@4.587,3.542
NET: J1.1 U1.60 | length 5.8
  Top Layer w0.508: J1.1@-5.253,20.661 ccw(c-3.695,19.103) -5.898,19.103 -5.898,18.033 ccw(c-3.358,18.033) -5.154,16.237 U1.60@-4.475,15.558
NET_LIGHT: LED1.1 U1.52 | length 4.8
  Top Layer w0.203: LED1.1@-0.357,23.523 1.484,23.523 2.179,22.828 2.179,22.213 U1.52@1.182,21.215
NetBATT_2: BATT.2 R7.2 U3.1 | length 11.8
  Top Layer w0.508: v1(-7.888,-16.786) U3.1@-6.955,-15.853
  Bottom Layer w0.508: R7.2@-12.934,-11.622 -14.445,-13.133 BATT.2@-14.445,-13.577 -11.236,-16.786 v1(-7.888,-16.786)
NetC2_2: C2.2 R18.2 | length 1.1
  Bottom Layer w0.203: R18.2@11.664,-5.412 11.664,-5.438 C2.2@12.442,-6.216
NetC3_1: C3.1 R2.2 R5.1 U3.8 | length 6.1
  Top Layer w0.254: U3.8@-4.48,-13.306 -5.124,-12.662 -5.124,-11.358 v1(-4.105,-10.339)
  Bottom Layer w0.254: R2.2@-4.542,-10.775 C3.1@-2.818,-9.051
NetC4_2: C4.2 R1.1 U3.5 Y2.1 | length 12.8
  Top Layer w0.152: U3.5@-5.541,-14.367 -4.448,-15.46 -0.29,-15.46 R1.1@0.395,-16.145 2.03,-17.78 Y2.1@2.03,-19.33 2.761,-19.33 C4.2@3.871,-20.44
NetC5_1: C5.1 U3.4 Y1.2 | length 5
  Top Layer w0.152: U3.4@-5.894,-14.72 -3.767,-16.847 Y1.2@-3.767,-17.162 -3.013,-17.162 C5.1@-2.339,-16.488
NetC6_2: C6.2 R1.2 U3.6 Y2.3 | length 10.8
  Top Layer w0.152: U3.6@-5.187,-14.013 -4.024,-15.176 0.84,-15.176 R1.2@1.103,-15.438 1.275,-15.438 Y2.3@2.386,-16.55 3.937,-14.999 C6.2@3.96,-14.999
NetC7_1: C7.1 U3.3 Y1.1 | length 6.1
  Top Layer w0.152: U3.3@-6.248,-15.074 -4.994,-16.328 -4.994,-18.389 Y1.1@-5.294,-18.689 -6.098,-19.493 C7.1@-6.098,-20.19
NetC8_2: C8.2 R6.2 U3.7 | length 3.3
  Top Layer w0.152: v1(-5.626,-12.867) U3.7@-4.834,-13.66
  Bottom Layer w0.152: v1(-5.626,-12.867) -5.895,-12.867 C8.2@-6.309,-12.453 -5.4,-11.544 R6.2@-5.4,-11.533
NetC22_1: C22.1 U8.4 | length 1.6
  Top Layer w0.254: C22.1@12.728,-15.571 13.199,-16.042 13.199,-16.5 U8.4@13.557,-16.858
NetC22_2: C22.2 U9.6 | length 1.2
  Top Layer w0.254: U9.6@11.235,-13.971 12.021,-14.757 C22.2@12.021,-14.864